# Altium PCB opg_receiver_pcb.PcbDoc
Units mm, origin at the board's own origin, x right, y up, seen from the top; angles counter-clockwise.
Board outline 24.75 x 25 mm, 4 copper layers (Signal Top, Ground, VCC, Signal Bottom), stack 1.903 mm thick; 31 components, 38 nets, 149 pads, 59 vias.
Unrouted connection lines stored in the file: 13.
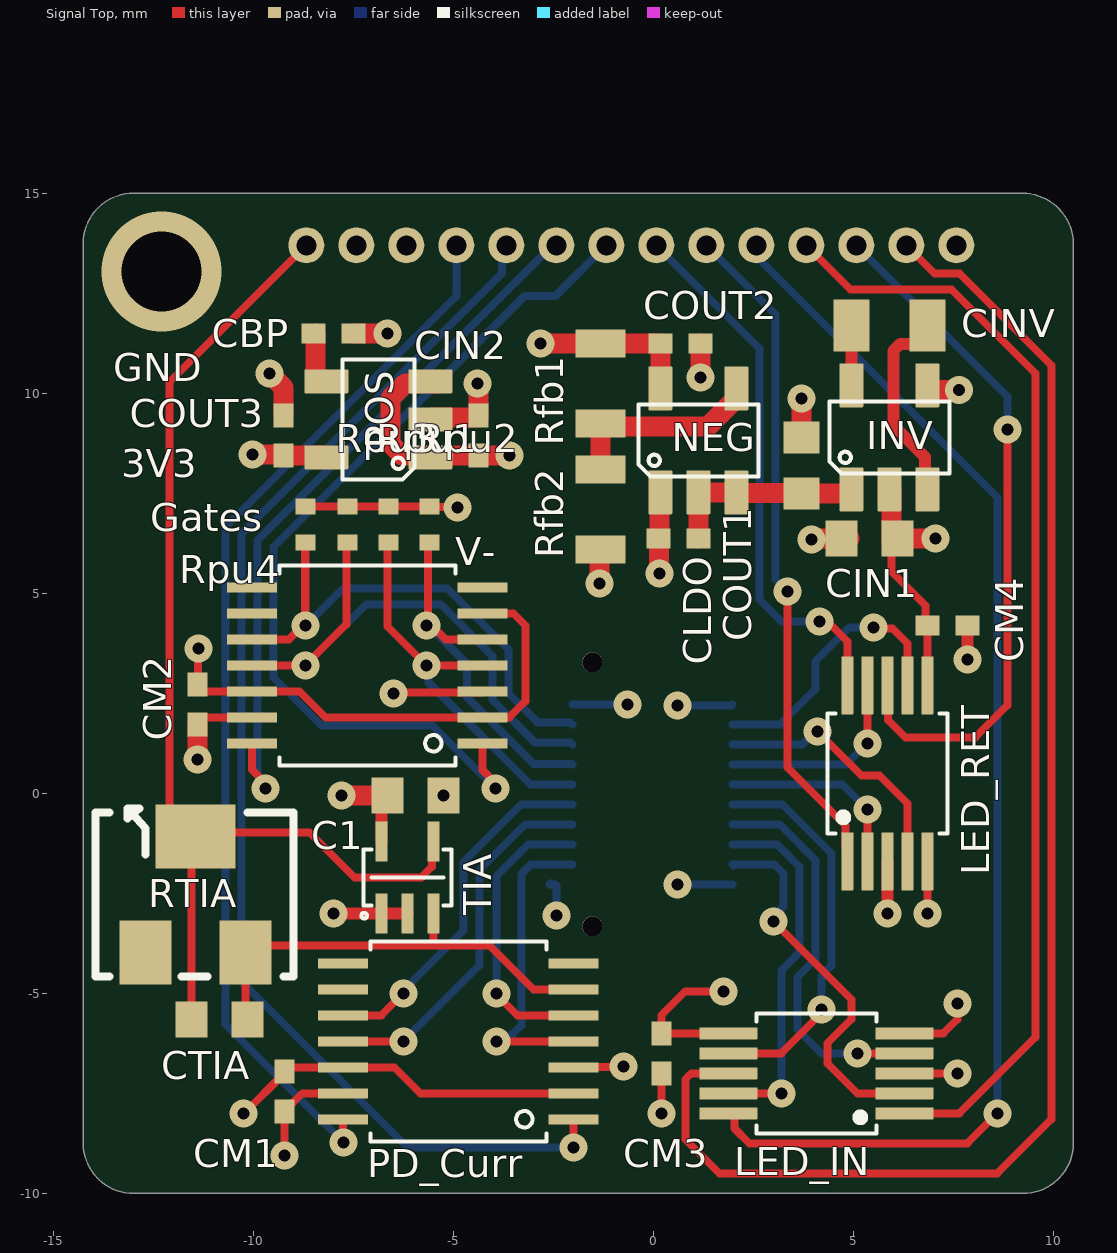
[diagram p0: Signal Top view]
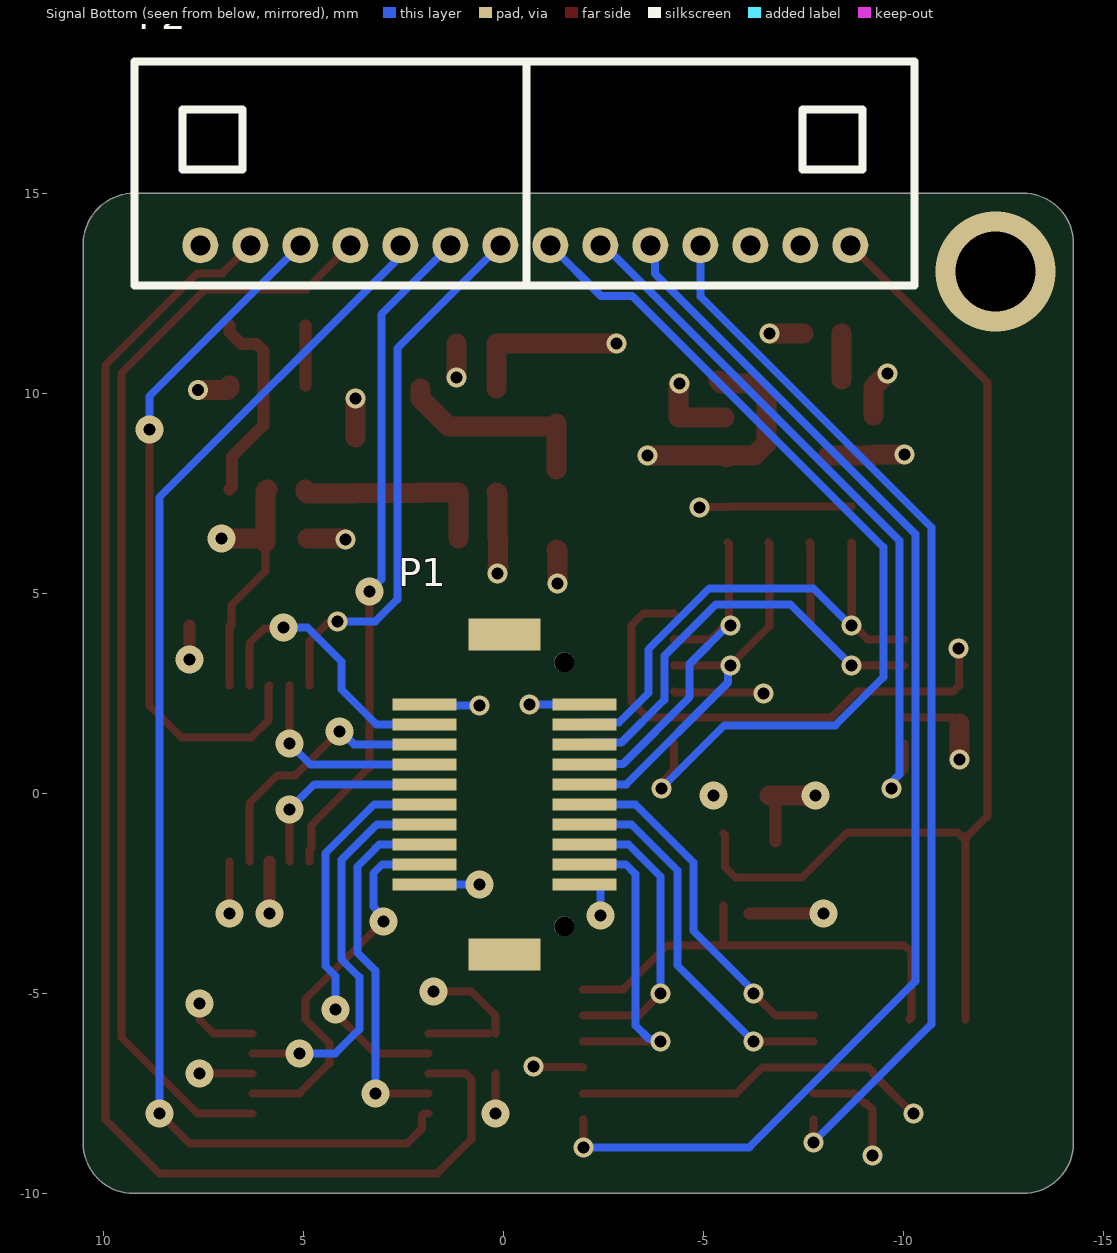
[diagram p1: Signal Bottom view, seen from below]
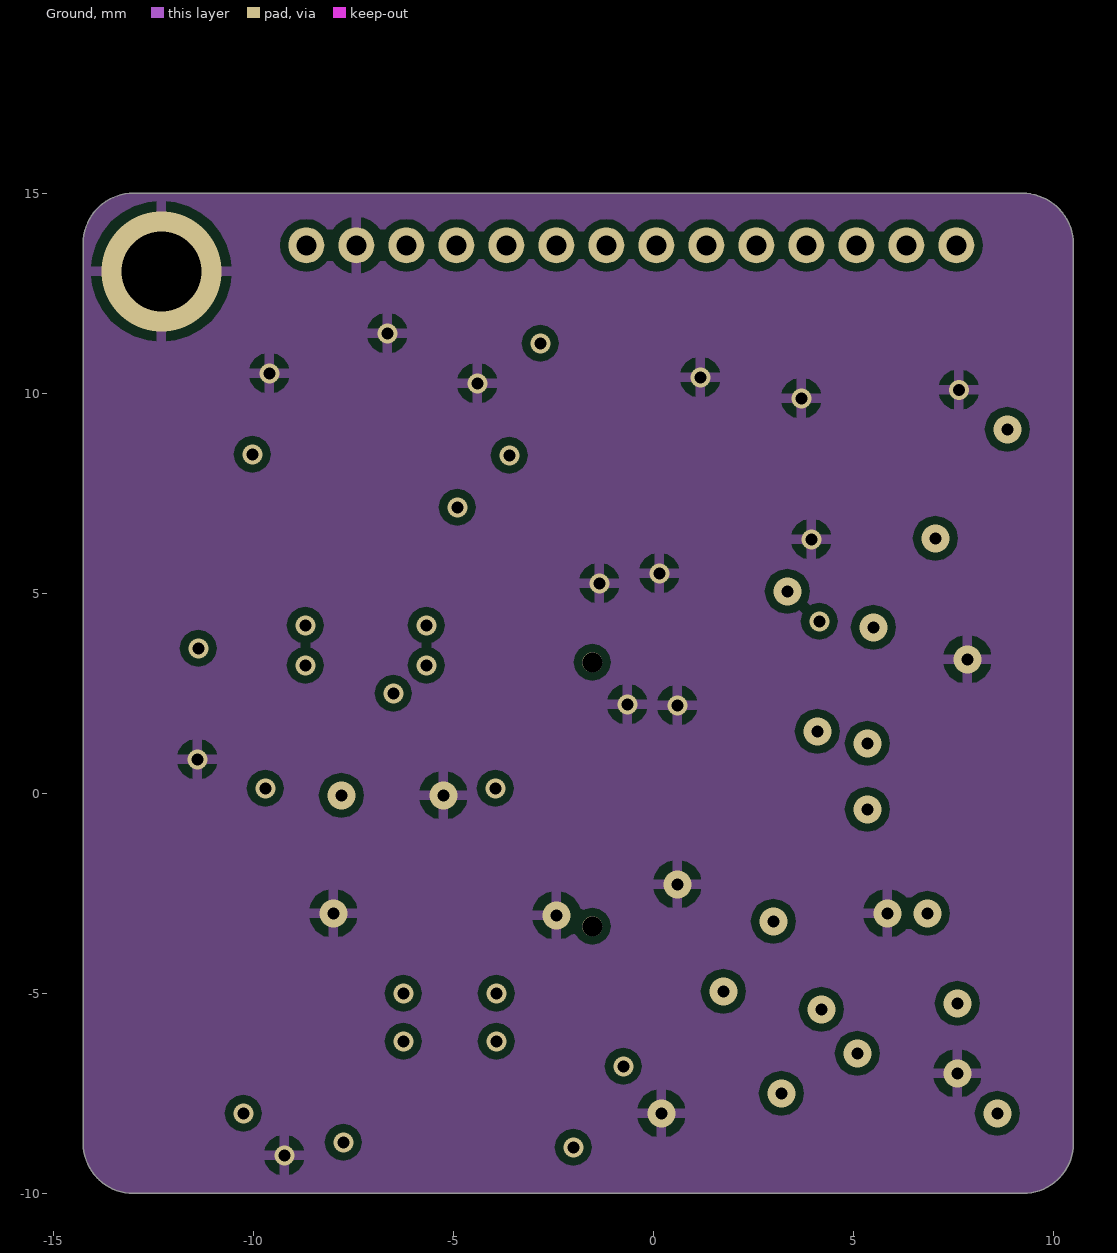
[diagram p2: Ground]
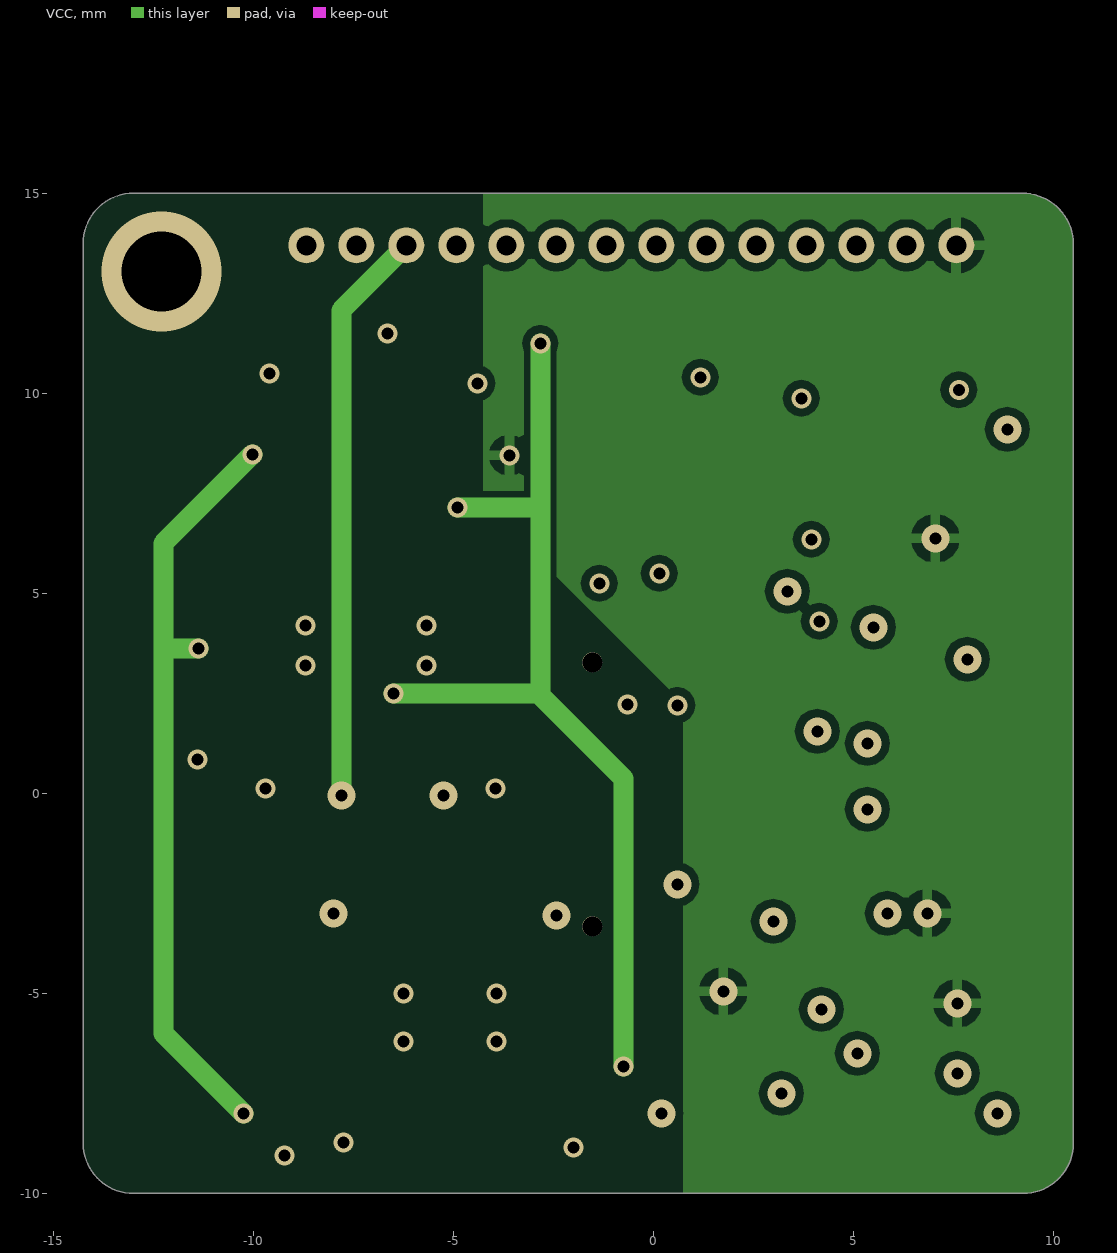
[diagram p3: VCC]

## Layer stack, top to bottom
Top Solder: solder mask 0.0102, Solder Resist, Dk 3.5
Signal Top: signal copper 0.035
Dielectric 2: prepreg 0.156, PP-006, Dk 4.1
Ground: signal copper 0.0356
Dielectric 1: dielectric 1.4495, FR-4, Dk 4.8
VCC: signal copper 0.0356
Dielectric 3: prepreg 0.156, PP-006, Dk 4.1
Signal Bottom: signal copper 0.035
Bottom Solder: solder mask 0.0102, Solder Resist, Dk 3.5

## Board outline
-14.25,-8.75 ccw(c-13,-8.75) -13,-10 9.25,-10 ccw(c9.25,-8.75) 10.5,-8.75 10.5,13.73 ccw(c9.23,13.73) 9.23,15 -13,15 ccw(c-13,13.75) -14.25,13.75

## Design rules (kind name [scope] priority, off if disabled: settings)
Clearance "Aisler Clearance" [All] p1: gap=0.2 ignorepadtopadclearanceinfootprint=FALSE except(0: Arc-Hole Track-Hole SMDPad-Hole THPad-Hole Via-Hole Fill-Hole Poly-Hole Region-Hole Text-Hole; 0.1: Arc-Via Track-Via SMDPad-Via; 0.15: Arc-SMDPad Arc-THPad Arc-Fill Arc-Poly Arc-Region Track-SMDPad Track-THPad Track-Fill Track-Poly Track-Region SMDPad-SMDPad) // Aisler PCB constraints
Clearance [All] p2: gap=0.2 ignorepadtopadclearanceinfootprint=FALSE except(0: Arc-Hole Track-Hole SMDPad-Hole THPad-Hole Via-Hole Fill-Hole Poly-Hole Region-Hole Text-Hole; 0.1: SMDPad-SMDPad; 0.15: Arc-Arc Arc-Track Arc-SMDPad Arc-THPad Track-Track Track-SMDPad Track-THPad SMDPad-THPad SMDPad-Fill SMDPad-Poly SMDPad-Region THPad-THPad)
HoleSize [All] p1: absolutevalues=TRUE maxlimit=4 minlimit=0.3 maxpercent=80.000 minpercent=20.000
HoleToHoleClearance [All] p1: gap=0.2 allowstackedmicrovias=TRUE
MinimumSolderMaskSliver [All] p1: minsoldermaskwidth=0.1
PolygonConnect [All] p1: connectstyle=Relief reliefconductorwidth=0.254 reliefentries=4 polygonreliefangle="90 Angle" airgapwidth=0.254
RoutingVias [All] p1: holewidth=1.5 width=2.5 viastyle="Through Hole" minholewidth=0.2 minwidth=0.4 maxholewidth=2 maxwidth=3
SilkToSilkClearance [All] p1: silktosilkclearance=0.1
SilkToSolderMaskClearance [IsPad] p1: minsilkscreentomaskgap=0.1 clearancetoexposedcopper=TRUE
SolderMaskExpansion [All] p1: expansion=0.102 istentingtop=FALSE
Width "Aisler Width" [All] p1: maxlimit=1 minlimit=0.1 preferedwidth=0.5 midlayer1_prefwidth=0.254 midlayer2_prefwidth=0.254 minimp=50.000000 maximp=50.000000 favimp=50.000000 // Aisler PCB Constraints
Width [All] p2: maxlimit=1 minlimit=0.1 preferedwidth=0.5 midlayer1_minwidth=0.254 midlayer1_maxwidth=0.254 midlayer1_prefwidth=0.254 midlayer2_minwidth=0.254 midlayer2_maxwidth=0.254 midlayer2_prefwidth=0.254 minimp=50.000000 maximp=50.000000 favimp=50.000000
25 further rules are at their usual default settings.

## Components (designator, comment, footprint, x,y, rotation, side; value= is the part's Value field where it differs from the comment)
C1 "0603, 25V" 1608[0603] -5.95,-0.05 r180 top value=100n
CBP "0402" 0402 -8,11.5 r0 top value=10n
CIN1 "0402, 10V" 1608[0603] 5.4,6.375 r0 top value=100n
CIN2 "0402" 0402 -4.375,8.95 r90 top value=1u
CINV "0805, 4.7u, 20V" WCAP-CSGP_0805_H=0.8mm_Reflow 5.9,11.7 r180 top
CLDO "0402" 0402 0.625,6.375 r180 top value=1u
CM1 "" 0402 -9.225,-7.45 r90 top value=100n
CM2 "" 0402 -11.4,2.225 r90 top value=100n
CM3 "" 0402 0.2,-6.5 r270 top value=100nF
CM4 "" 0402 7.35,4.2 r180 top value=100nF
COUT1 "0603, 10V" 1608[0603] 3.7,8.2 r90 top value=4.7u
COUT2 "0402" 0402 0.675,11.25 r180 top value=1u
COUT3 "0402" 0402 -9.25,8.95 r270 top value=1u
CTIA "0603, 25V" 1608[0603] -10.85,-5.65 r180 top value=47pF
Gates "DG604EEQ-T1-GE4" DG604EEQ-T1-GE4 -7.15,3.2 r90 top
INV "MAX871EUK+T" MAX871EUK+T 5.9,8.85 r90 top
LED_IN "TMUX1104" TMUX1104_legged 6.275,-6 r180 top
LED_RET "TMUX1104" TMUX1104_legged 6.85,-1.7 r90 top
NEG "MAX1735EUK30-T" MAX1735EUKxx-T 1.125,8.825 r90 top
P1 "AMPHENOL_10132798-022100LF_Bergstak_receptable" AMPHENOL_10132798-022100LF_Bergstak_receptable -0.025,-0.025 r270 bottom
P2 "MOLEX_530481410_picoBlade_14pin" MOLEX_530481410_picoBlade_14pin -0.575,13.7 r180 bottom
PD_Curr "DG604EEQ-T1-GE4" DG604EEQ-T1-GE4 -4.875,-6.2 r90 top
POS "LDK130" LDK130 -6.9,9.3 r180 top
Rfb1 "100k" WRIS-KSKE_0805 -1.325,10.25 r270 top
Rfb2 "220k" WRIS-KSKE_0805 -1.325,7.1 r270 top
Rpu1 "10k" WRIS-KSKE_0402 -6.625,6.725 r270 top
Rpu2 "10k" WRIS-KSKE_0402 -5.6,6.725 r270 top
Rpu3 "10k" WRIS-KSKE_0402 -7.65,6.725 r270 top
Rpu4 "10k" WRIS-KSKE_0402 -8.7,6.725 r270 top
RTIA "BOURNS_PVG5A_SERIES" BOURNS_PVG5A_SERIES -11.45,-2.525 r0 top
TIA "OPA172_36V" OPA172_36V_SC70-5 -2.568,-0.165 r90 top

## Footprints (in the part's own frame and the unit in brackets; to place one, negate y for a bottom-side part, rotate by r counter-clockwise, add the part's x,y. Pads: shape width x height; smd on the part's side, far side on the other; paste and mask are expansions set on the pad)
0402 [mm] "Chip Capacitor, Body 1.0x0.5mm, IPC High Density"
  rect 0.6x0.5 smd: 1(-0.5,0) 2(0.5,0)
  body extent -0.55,-0.3 0.55,0.3, height 1.3
1608[0603] [mm] "Chip Capacitor, Body 1.6x0.8mm, IPC High Density"
  rect 0.8x0.9 smd: 1(-0.7,0) 2(0.7,0)
  body extent -0.87,-0.48 0.87,0.48, height 1.3
AMPHENOL_10132798-022100LF_Bergstak_receptable [mm] "receptable/female, 0.5 mm pitch, 20 pin, 3 mm mated height"
  rect 0.8x1.8 smd: 0(-4,0) 0(4,0)
  round 0.5 hole 0.5 unplated: 0(-3.3,1.5) 0(3.3,1.5)
  rect 0.3x1.6 smd mask+0.05: 1(-2.25,-2) 2(-1.75,-2) 3(-1.25,-2) 4(-0.75,-2) 5(-0.25,-2) 6(0.25,-2) 7(0.75,-2) 8(1.25,-2) 9(1.75,-2) 10(2.25,-2) 11(2.25,2) 12(1.75,2) 13(1.25,2) 14(0.75,2) 15(0.25,2) 16(-0.25,2) 17(-0.75,2) 18(-1.25,2) 19(-1.75,2) 20(-2.25,2)
  body extent -4,-2.3 4,2.3, height 2.3
BOURNS_PVG5A_SERIES [mm]
  rect 1.3x1.6 smd: 1(-1.25,-1.45) 3(1.25,-1.45)
  rect 2x1.6 smd: 2(0,1.45)
  silkscreen extent -2.5,-2.05 2.45,2.15, body extent -2.43,-1.98 2.4,1.98, height 5.29
DG604EEQ-T1-GE4 [mm] "Multiplex-Schalter IC CMOS 4:1 Multiplxr 14-pin TSSOP"
  rect 0.25x1.25 smd: 1(-1.95,-2.88) 2(-1.3,-2.88) 3(-0.65,-2.88) 4(0,-2.88) 5(0.65,-2.88) 6(1.3,-2.88) 7(1.95,-2.88) 8(1.95,2.88) 9(1.3,2.88) 10(0.65,2.88) 11(0,2.88) 12(-0.65,2.88) 13(-1.3,2.88) 14(-1.95,2.88)
  silkscreen extent -2.5,-2.2 2.5,2.2, body extent -2.5,-2.2 2.5,2.2, height 1.2
LDK130 [mm] "300 mA low quiescent current very low noise LDO"
  rrect7% 1.1x0.6 smd: 1(-1.325,0.9) 2(-1.325,-0.05) 3(-1.325,-1) 4(1.275,-1) 5(1.275,0.9)
  silkscreen extent -0.93,-1.55 0.87,1.45, body extent -1.43,-1.5 1.37,1.4, height 1.55
MAX871EUK+T [mm] "500 kHz Switched-Capacitor Voltage Inverters"
  rrect7% 1.1x0.6 smd: 1(-1.25,0.95) 2(-1.25,0) 3(-1.25,-0.95) 4(1.35,-0.95) 5(1.35,0.95)
  silkscreen extent -0.85,-1.5 0.95,1.5, body extent -1.35,-1.45 1.45,1.45, height 1.55
MAX1735EUKxx-T [mm] "Fixed and adjustable negative LDO"
  rrect7% 1.1x0.6 smd: 1(-1.3,0.95) 2(-1.3,0) 3(-1.3,-0.95) 4(1.3,-0.95) 5(1.3,0.95)
  silkscreen extent -0.9,-1.5 0.9,1.5, body extent -1.4,-1.45 1.4,1.45, height 1.55
MOLEX_530481410_picoBlade_14pin [mm] "pico Blade connector wire-to-board"
  round 0.9 hole 0.5: 1(-8.15,0) 2(-6.9,0) 3(-5.65,0) 4(-4.4,0) 5(-3.15,0) 6(-1.9,0) 7(-0.65,0) 8(0.6,0) 9(1.85,0) 10(3.1,0) 11(4.35,0) 12(5.6,0) 13(6.85,0) 14(8.1,0)
  silkscreen extent -9.8,-1 9.7,4.6, body extent -9.65,-0.92 9.6,4.57, height 3.6
OPA172_36V_SC70-5 [mm] "36-V, Single-Supply, 10-MHz, Rail-to-Rail Output Operational Amplifiers"
  rrect0% 1x0.3 smd mask+0.07: 1(-2.835,4.232) 2(-2.835,3.582) 3(-2.835,2.932) 4(-1.035,2.932) 5(-1.035,4.232)
  silkscreen extent -2.97,2.48 -1.24,4.73, body extent -2.94,2.58 -0.94,4.58, height 1.05
TMUX1104_legged [mm]
  rrect5% 1.45x0.3 smd mask+0: 1(0,2) 2(0,1.5) 3(0,1) 4(0,0.5) 5(0,0) 6(4.4,0) 7(4.4,0.5) 8(4.4,1) 9(4.4,1.5) 10(4.4,2)
  silkscreen extent 0.7,-0.5 3.7,2.5, body extent 0.65,-0.55 3.75,2.55, height 1.1
WCAP-CSGP_0805_H=0.8mm_Reflow [mm] "Ceramic Capacitors, body 2x1.25mm"
  rect 0.9x1.3 smd: 1(-0.95,0) 2(0.95,0)
  body extent -1,-0.62 1,0.63, height 0.8
WRIS-KSKE_0402 [mm] "Thick Film Resistors, SMT, body size 1x0.5mm"
  rect 0.4x0.5 smd: 1(-0.45,0) 2(0.45,0)
  body extent -0.5,-0.25 0.5,0.25, height 0.35
WRIS-KSKE_0805 [mm] "Thick Film Resistors, SMT, body size 2x1.25mm"
  rect 0.7x1.25 smd: 1(-1,0) 2(1,0)
  body extent -1,-0.62 1,0.63, height 0.6

## Part data
C1 CBP CIN1 CIN2 CLDO CM1 CM2 CM3 CM4 COUT1 COUT2 COUT3 CTIA: library part "Cap Semi", "Capacitor (Semiconductor SIM Model)", LatestRevisionDate=29-May-2009, LatestRevisionNote="IPC-7351 Footprint Added.", PackageDescription="Chip Capacitor", PackageReference=C1206, Published=8-Jun-2000, Publisher="Altium Limited"
CINV: library part 885012207032, "WCAP-CSGP Multilayer Ceramic Chip Capacitor, General Purpose, size 0805, X7R, 680pF, 16V", Capacitance=680pF, Capacitance Tolerance=+/-10%, Isolation Resistance  min.=10GOhm, Manufacturer="Wurth Elektronik", Operating Temperature="-55 to +125degC", Rated Voltage=16VDC, Ceramic Type=X7R, ComponentLink1Description=Manufacturer, ComponentLink1URL=http://www.we-online.de, ComponentLink2Description=Datasheet, ComponentLink2URL=https://www.we-online.com/catalog/datasheet/885012207032.pdf, Dissipation Factor max.=3.5%, Height=0.8mm, Manufacturer Part Number=885012207032, Mounting Technology=SMT, Packaging="Tape and Reel", Published Date="April 2021", Q-Factor min.=-, Size=0805, Technical Reference=X7R0805681K016DFCT10000
Gates PD_Curr: "Multiplex-Schalter IC CMOS 4:1 Multiplxr 14-pin TSSOP"
INV: "500 kHz Switched-Capacitor Voltage Inverters"
LED_IN LED_RET: "4:1 MUX"
NEG: library part MAX1735EUKxx-T
P1: "20 pin, 0.5 mm pitch, 3 mm mated height, female/receptable"
POS: "300 mA low quiescent current very low noise LDO"
Rfb1 Rfb2: library part 560050320011, "WRIS-KSKE SMT Thick Film Resistor, size 0805, 1Ohm, 0.33W", Manufacturer="Wurth Elektronik", Operating Temperature="-55 to +155degC", Rated Current=0.57A, Rated Power=0.33W, Resistance=1Ohm, Resistance Tolerance=+/-1%, Temperature Coefficient of Resistance=+/-100ppm/degC, ComponentLink1Description=Manufacturer, ComponentLink1URL=http://www.we-online.de, ComponentLink2Description=Datasheet, ComponentLink2URL=https://www.we-online.com/catalog/datasheet/560050320011.pdf, Height=0.6mm, Length=2mm, Manufacturer Part Number=560050320011, Mounting Technology=SMT, Packaging="Tape and Reel", Published Date="May 2020", Size=0805, Technical Reference=KE08051R00F103KAATP0000, Width=1.25mm
Rpu1 Rpu2 Rpu3 Rpu4: library part 560050310009, "WRIS-KSKE SMT Thick Film Resistor, size 0402, 10Ohm, 0.125W", Manufacturer="Wurth Elektronik", Operating Temperature="-55 to +155degC", Rated Current=0.11A, Rated Power=0.125W, Resistance=10Ohm, Resistance Tolerance=+/-1%, Temperature Coefficient of Resistance=+/-100ppm/degC, ComponentLink1Description=Manufacturer, ComponentLink1URL=http://www.we-online.de, ComponentLink2Description=Datasheet, ComponentLink2URL=https://www.we-online.com/catalog/datasheet/560050310009.pdf, Height=0.35mm, Length=1mm, Manufacturer Part Number=560050310009, Mounting Technology=SMT, Packaging="Tape and Reel", Published Date="May 2020", Size=0402, Technical Reference=KE04020100F108KAATH0000, Width=0.5mm
TIA: "OPAx172 36-V, Single-Supply, 10-MHz, Rail-to-Rail Output Operational Amplifiers"

## Via types
v1: diameter 0.7/0.5/0.5/0.5 (per signal layer), hole 0.3, Signal Top to Signal Bottom, 34 vias
v2: diameter 0.7, hole 0.3, Signal Top to Signal Bottom, 24 vias
v3: diameter 3, hole 2, Signal Top to Signal Bottom, 1 vias

## Nets (pads, with @x,y where several pads share a name; then routed paths per layer and width w, separated by ;. In a path a pad name is that pad's centre, name@x,y a point inside that pad or via, vN(x,y) a via of type N, cw(c..) or ccw(c..) an arc to the next point about the centre after c; other vN are vias at no path point)
3V3: CM1.2 CM2.2 COUT3.2 Gates.2 Gates.6 Gates.12 PD_Curr.2 PD_Curr.12 POS.5 | length 42.8
  Signal Top w0.2: v1(-11.375,3.625) -11.387,3.612 -11.387,2.738 CM2.2 -11.4,2.7 -11.25,2.55 Gates.12 -8.85,2.55 -8.2,1.9 Gates.2 -3.6,1.9 -3.2,2.3 -3.2,4.2 -3.5,4.5 Gates.6 ; v1(-10.25,-8) -10.225,-8 -9.258,-7.033 -9.258,-6.983 CM1.2 -9.125,-6.85 PD_Curr.12 -6.475,-6.85 -5.825,-7.5 PD_Curr.2
  Signal Top w0.5: v1(-10.025,8.475) -9.25,8.475 COUT3.2 POS.5@-8.125,8.45
  VCC w0.5: v1(-11.375,3.625) -12.25,3.625 ; v1(-10.25,-8) -12.25,-6 -12.25,3.625 ; v1(-10.025,8.475) -12.25,6.25 -12.25,3.625
5V: CIN1.2 CIN2.1 CM3.1 CM4.2 INV.2 LED_IN.5 LED_IN.6 LED_RET.5 LED_RET.6 P2.1 POS.1 POS.3 | length 18.8
  Signal Top w0.2: CM3.1 0.2,-5.55 0.8,-4.95 v2(1.75,-4.95) ; CM3.1@0.375,-6 LED_IN.6 ; CIN1.2@5.95,6.275 5.95,5.55 6.8,4.7 6.8,4.2 CM4.2 LED_RET.6 ; LED_IN.5 7.25,-6 7.6,-5.65 v2(7.6,-5.25) ; v2(6.85,-3) LED_RET.5
  Signal Top w0.5: POS.1 -5.625,8.45 -6.282,8.45 -6.575,8.743 -6.575,9.875 -6.2,10.25 -5.45,10.25 POS.3@-5.375,10.325 ; POS.1@-5.525,8.45 CIN2.1 v1(-3.6,8.45) ; INV.2 5.95,7.55 CIN1.2@5.95,6.275 ; CIN1.2 v2(7.05,6.375)
12V: C1.2 P2.12 TIA.5 | length 16.8
  Signal Top w0.3: TIA.5 -6.8,-0.1 -6.75,-0.05 C1.2@-6.675,0.025
  Signal Top w0.5: v2(-7.8,-0.05) -6.75,-0.05 C1.2
  VCC w0.5: v2(-7.8,-0.05) -7.8,12.075 P2.12
GND: C1.1 CBP.2 CIN1.1 CIN2.2 CLDO.2 CM1.1 CM2.1 CM3.2 CM4.1 COUT1.2 COUT2.1 COUT3.1 Gates.13 INV.4 LED_IN.3 LED_RET.3 NEG.1 P1.1 P1.10 P1.11 P1.20 P2.13 PD_Curr.13 POS.2 Rfb2.2 TIA.1 TIA.2 | length 27.2
  Signal Top w0.2: CM2.1@-11.4,1.75 -11.25,1.9 Gates.13 ; v1(-9.225,-9.05) CM1.1 -9.225,-7.9 -9.075,-7.75 -9.025,-7.75 -8.775,-7.5 PD_Curr.13 ; v2(0.2,-8) CM3.2 ; LED_IN.3 v2(7.6,-7)
  Signal Top w0.3: v2(-8,-3) TIA.1 TIA.2 ; v2@5.85,-2.9 LED_RET.3 ; v2(7.85,3.35) CM4.1
  Signal Top w0.5: v1(-11.4,0.85) CM2.1 CM2.1@-11.4,1.75 ; v1(-9.6,10.5) -9.25,10.15 COUT3.1 ; CBP.2 v1(-6.65,11.5) ; POS.2@-5.525,9.4 -4.621,9.4 -4.375,9.4 CIN2.2 -4.375,10.225 v1(-4.4,10.25) ; v1(-1.35,5.25) -1.35,6.075 Rfb2.2 ; v1@0.125,5.675 v1@0.137,5.663 ; CLDO.2 CLDO.2@0.137,6.375 ; v1(0.15,5.5) v1@0.15,5.592 ; NEG.1 0.15,7.5 0.15,6.375 CLDO.2@0.137,6.375 ; v1(1.175,10.4) COUT2.1 ; COUT1.2 v1(3.7,9.875) ; v1(3.95,6.35) 3.975,6.375 CIN1.1@4.9,6.375 ; INV.4 6.85,10.138 6.9,10.088 v1(7.637,10.088) ; v1@0.137,5.663 0.15,5.65 v1@0.15,5.592 ; v1@0.137,5.663 CLDO.2@0.137,6.375 ; v1@0.137,5.663 0.137,5.592 v1@0.15,5.592
  Signal Bottom w0.2: P1.11@-2.575,-2.25 -2.6,-2.275 -2.45,-2.275 -2.425,-2.3 v2(-2.425,-3.05) ; P1.20 v1(-0.65,2.225) ; v2(0.6,-2.275) P1.10 ; v1(0.6,2.2) 1.95,2.2 P1.1
  other v2: 5.85,-3 -5.25,-0.05
  other v3: -12.3,13.05
Iphoto: CTIA.1 PD_Curr.6 RTIA.3 TIA.3 | length 11.4
  Signal Top w0.2: CTIA.1 -10.2,-5.6 RTIA.3 -10.025,-3.8 -5.5,-3.8 ; TIA.3@-5.5,-2.8 -5.5,-3.8 ; PD_Curr.6 -3,-4.9 -4.1,-3.8 -5.5,-3.8
LED_IN: LED_IN.8 P2.2 | length 36.4
  Signal Top w0.2: LED_IN.8 0.95,-7 0.8,-7.15 0.8,-8.65 1.65,-9.5 8.6,-9.5 9.95,-8.15 9.95,10.7 7.65,13 7.025,13 P2.2
LED_IN_A0: LED_IN.1 P2.4 | length 27.7
  Signal Top w0.2: P2.4 4.925,12.6 7.45,12.6 9.55,10.5 9.55,-6.1 7.65,-8 LED_IN.1
LED_IN_A1: LED_IN.10 P2.5 | length 31.9
  Signal Top w0.2: LED_IN.10 1.983,-8 2.033,-8.05 2.033,-8.383 2.4,-8.75 7.85,-8.75 v2(8.6,-8)
  Signal Bottom w0.2: P2.5 2.709,13.566 2.709,13.291 8.6,7.4 v2@8.6,-8.15
LED_IN_row1: LED_IN.2 P1.9 | length 9.5
  Signal Top w0.2: v2(3,-3.2) 4.95,-5.15 4.95,-5.65 4.35,-6.25 4.35,-6.75 5.1,-7.5 LED_IN.2
  Signal Bottom w0.2: P1.9@2,-1.8 P1.9 3.025,-1.775 3.25,-2 3.25,-2.833 3,-3.083 v2(3,-3.2)
LED_IN_row2: LED_IN.9 P1.8 | length 9.1
  Signal Top w0.2: LED_IN.9 v2(3.2,-7.5)
  Signal Bottom w0.2: P1.8 3.094,-1.275 3.191,-1.372 3.191,-1.375 3.65,-1.834 3.65,-3.981 3.2,-4.431 v2(3.2,-7.5)
LED_IN_row3: LED_IN.4 P1.7 | length 9.8
  Signal Top w0.2: v2(5.1,-6.5) LED_IN.4
  Signal Bottom w0.2: P1.7 3.159,-0.775 4.05,-1.666 4.05,-4.147 3.6,-4.597 3.6,-5.9 4.2,-6.5 v2(5.1,-6.5)
LED_IN_row4: LED_IN.7 P1.6 | length 10
  Signal Top w0.2: LED_IN.7 3.2,-6.5 4.3,-5.4 v2(4.2,-5.4)
  Signal Bottom w0.2: P1.6 3.225,-0.275 4.45,-1.5 4.45,-4.313 4.2,-4.563 v2(4.2,-5.4)
LED_OUT: LED_RET.8 P2.3 | length 17.4
  Signal Top w0.2: LED_RET.8 5.872,2.678 5.872,1.828 6.3,1.4 8.05,1.4 8.85,2.2 v2(8.85,9.1)
  Signal Bottom w0.2: P2.3 8.85,9.925 v2(8.85,9.1)
LED_OUT_A0: LED_RET.1 P2.6 | length 16.9
  Signal Top w0.2: v2(3.35,5.05) 3.35,0.65 4.8,-0.8 4.8,-1.367 4.85,-1.417 LED_RET.1
  Signal Bottom w0.2: P2.6 3.05,11.975 3.05,5.35 v2(3.35,5.05)
LED_OUT_A1: LED_RET.10 P2.7 | length 13.7
  Signal Top w0.2: v1(4.15,4.3) 4.35,4.3 4.85,3.8 LED_RET.10
  Signal Bottom w0.2: P2.7 2.65,11.125 2.65,4.85 3.2,4.3 v1(4.15,4.3)
LED_OUT_col1: LED_RET.2 P1.5 | length 4.9
  Signal Top w0.2: LED_RET.2 v2(5.35,-0.4)
  Signal Bottom w0.2: P1.5 4.725,0.225 v2(5.35,-0.4)
LED_OUT_col2: LED_RET.9 P1.4 | length 5
  Signal Top w0.2: v2(5.35,1.25) LED_RET.9
  Signal Bottom w0.2: P1.4 4.825,0.725 v2(5.35,1.25)
LED_OUT_col3: LED_RET.4 P1.3 | length 6.7
  Signal Top w0.2: v2(4.1,1.55) 5.2,0.45 5.65,0.45 6.35,-0.25 LED_RET.4
  Signal Bottom w0.2: P1.3 3.733,1.225 4.058,1.55 v2(4.1,1.55)
LED_OUT_col4: LED_RET.7 P1.2 | length 7
  Signal Top w0.2: v2(5.5,4.15) 5.535,4.115 5.985,4.115 6.35,3.75 LED_RET.7
  Signal Bottom w0.2: P1.2 3.175,1.725 4.05,2.6 4.05,3.3 4.9,4.15 v2(5.5,4.15)
NetCBP_1: CBP.1 POS.4 | length 1.2
  Signal Top w0.5: POS.4@-8.45,10.35 CBP.1@-8.45,11.5
NetCINV_1: CINV.1 INV.3 | length 5
  Signal Top w0.3: INV.3 6.788,7.662 6.788,8.412 6,9.2 6,11.062 6.176,11.238 6.55,11.238 6.85,11.538 CINV.1
NetCINV_2: CINV.2 INV.5 | length 1.5
  Signal Top w0.3: INV.5 CINV.2
NetCLDO_1: CLDO.1 COUT1.1 INV.1 NEG.2 NEG.3 | length 5.1
  Signal Top w0.5: CLDO.1 NEG.2 NEG.3 2.087,7.513 3.687,7.513 COUT1.1 4.9,7.5 4.95,7.55 INV.1
NetNEG_4: NEG.4 Rfb1.2 Rfb2.1 | length 5.1
  Signal Top w0.5: Rfb2.1 Rfb1.2 -1.25,9.175 1.375,9.175 2.075,9.875 NEG.4
PD_A0: P2.10 PD_Curr.1 | length 31.9
  Signal Top w0.2: v1(-2,-8.85) -2,-8.155 PD_Curr.1
  Signal Bottom w0.2: P2.10 -3.789,13.586 -3.789,12.996 -10.3,6.484 -10.3,-4.7 -6.15,-8.85 v1(-2,-8.85)
PD_A1: P2.11 PD_Curr.14 | length 26.6
  Signal Top w0.2: PD_Curr.14 -7.755,-8.72 v1(-7.75,-8.725)
  Signal Bottom w0.2: v1(-7.75,-8.725) -10.7,-5.775 -10.7,6.65 -4.925,12.425 P2.11
PD_col1: P1.12 PD_Curr.4 | length 7.9
  Signal Top w0.2: v1@-3.9,-6.2 PD_Curr.4
  Signal Bottom w0.2: v1(-3.925,-6.2) -3.868,-6.143 -3.643,-6.143 -3.3,-5.8 -3.3,-2.016 -3.059,-1.775 P1.12
PD_col2: P1.13 PD_Curr.5 | length 7.3
  Signal Top w0.2: v1@-3.925,-5.025 -3.4,-5.55 PD_Curr.5
  Signal Bottom w0.2: v1@-3.925,-5.025 -3.925,-2.075 -3.125,-1.275 P1.13
  other v1: -3.925,-5
PD_col3: P1.14 PD_Curr.11 | length 9.3
  Signal Top w0.2: PD_Curr.11 v1@-6.3,-6.2
  Signal Bottom w0.2: v1(-6.25,-6.2) -4.35,-4.3 -4.35,-1.925 -3.2,-0.775 P1.14
PD_col4: P1.15 PD_Curr.10 | length 9
  Signal Top w0.2: PD_Curr.10 -6.8,-5.55 v1(-6.25,-5)
  Signal Bottom w0.2: v1(-6.25,-5) -6.25,-4.934 -4.75,-3.434 -4.75,-1.725 -3.3,-0.275 P1.15
PD_Gate_row1: Gates.4 P1.16 Rpu1.2 | length 10
  Signal Top w0.2: Rpu1.2 -6.65,6.25 -6.65,4.175 v1(-5.675,3.2) Gates.4
  Signal Bottom w0.2: v1@-5.675,3.225 -5.618,3.168 -5.618,2.768 -3.075,0.225 P1.16
PD_Gate_row2: Gates.5 P1.17 Rpu2.2 | length 9.2
  Signal Top w0.2: Rpu2.2 -5.637,6.238 -5.637,4.238 v1(-5.675,4.2) -5.545,4.2 -5.195,3.85 Gates.5
  Signal Bottom w0.2: v1@-5.625,4.2 -4.656,3.231 -4.656,2.402 -2.989,0.735 -2.035,0.735 P1.17
PD_Gate_row3: Gates.11 P1.18 Rpu3.2 | length 14.2
  Signal Top w0.2: Gates.11 v1(-8.7,3.2) -7.675,4.225 -7.675,6.25 Rpu3.2
  Signal Bottom w0.2: v1(-8.7,3.2) -7.175,4.725 -5.316,4.725 -4.025,3.434 -4.025,2.337 -2.956,1.268 -2.068,1.268 P1.18
PD_Gate_row4: Gates.10 P1.19 Rpu4.2 | length 14.8
  Signal Top w0.2: Gates.10 -9.105,3.85 -8.755,4.2 -8.712,4.2 -8.712,6.263 Rpu4.2 v1(-8.7,4.2)
  Signal Bottom w0.2: v1@-8.725,4.15 -7.75,5.125 -5.15,5.125 -3.625,3.6 -3.625,2.503 -2.897,1.775 -2.075,1.775 P1.19
PD_Gates_A0: Gates.1 P2.8 | length 22.7
  Signal Top w0.2: Gates.1 -4.27,0.58 -3.95,0.26 v1(-3.95,0.125)
  Signal Bottom w0.2: v1(-3.95,0.125) -5.525,1.7 -8.3,1.7 -9.5,2.9 -9.5,6.153 -3.221,12.432 -2.444,12.432 P2.8
PD_Gates_A1: Gates.14 P2.9 | length 17.9
  Signal Top w0.2: Gates.14 -10.03,0.59 -9.7,0.26 v1(-9.7,0.125)
  Signal Bottom w0.2: v1@-9.7,0.267 -9.9,0.467 -9.9,6.319 -2.519,13.7 P2.9
Vneg: COUT2.2 Gates.3 NEG.5 PD_Curr.3 Rfb1.1 Rpu1.1 Rpu2.1 Rpu3.1 Rpu4.1 | length 36.1
  Signal Top w0.2: Rpu4.1 Rpu3.1 Rpu1.1 Rpu2.1 -5.587,7.163 -4.912,7.163 v1(-4.9,7.15) ; v1(-6.5,2.5) -6.475,2.525 -4.295,2.525 Gates.3 ; PD_Curr.3 -1.982,-6.838 -0.763,-6.838 v1(-0.75,-6.825)
  Signal Top w0.5: v1(-2.825,11.25) Rfb1.1 0.125,11.25 COUT2.2 NEG.5
  VCC w0.5: v1(-6.5,2.5) -2.825,2.5 ; v1(-4.9,7.15) -2.825,7.15 ; v1(-2.825,11.25) -2.825,7.15 ; v1(-0.75,-6.825) -0.75,0.375 -2.825,2.45 -2.825,7.15
Vphoto: CTIA.2 P2.14 RTIA.2 TIA.4 | length 28.5
  Signal Top w0.2: CTIA.2 -11.55,-1.175 RTIA.2 ; P2.14 -12.1,10.275 -12.1,-0.575 -11.6,-1.075 RTIA.2 ; TIA.4@-5.5,-1 -5.537,-1.037 -5.537,-1.837 -5.8,-2.1 -7.475,-2.1 -8.6,-0.975 -11.35,-0.975 RTIA.2
pads on no net: Gates.7 Gates.8 Gates.9 P1.0 PD_Curr.7 PD_Curr.8 PD_Curr.9 RTIA.1

## Polygon pours and split planes (outlines as drawn)
5V on VCC "5V_L03_P003" (solid, pour order 3): -4.25,7.25 -1.5,4.5 0.75,2.25 0.75,-10 9.25,-10 ccw(c9.25,-8.75) 10.5,-8.75 10.5,13.73 ccw(c9.23,13.73) 9.23,15 -4.25,15
GND on Ground "GND_L02_P000" (solid, remove dead copper, pour order 0): -14.25,-8.75 -14.25,13.75 cw(c-13,13.75) -13,15 9.23,15 cw(c9.23,13.73) 10.5,13.73 10.5,-8.75 cw(c9.25,-8.75) 9.25,-10 -13,-10 cw(c-13,-8.75)

## Silkscreen, mask and mechanical layers (free items; w line width, h text height)
Top Overlay:
  text "GND" at -13.5,10.3 h0.7
  text "3V3" at -13.3,7.9 h0.7
  text "V-" at -4.95,5.7 h0.7
5V_PLANE:
  lines w0.2: -4.25,7.25 -4.25,8.25 -4.25,15 9.23,15 cw(c9.23,13.73) 10.5,13.73 10.5,-8.75 cw(c9.25,-8.75) 9.25,-10 0,-10 0,3 -1.5,4.5 -4.25,7.25
board_shape:
  lines w0.2: 10.5,-7.5 10.5,-7.25 ; -14.25,-8.75 ccw(c-13,-8.75) -13,-10 9.25,-10 ccw(c9.25,-8.75) 10.5,-8.75 10.5,-7.75 10.5,13.73 ccw(c9.23,13.73) 9.23,15 -13,15 ccw(c-13,13.75) -14.25,13.75 -14.25,-8.75